# Altium PCB LEDKEY.PcbDoc
Units mm, origin at the board's own origin, x right, y up, seen from the top; angles counter-clockwise.
Board outline 53.47 x 33.05 mm, 2 copper layers (Top Layer, Bottom Layer); 32 components, 25 nets, 85 pads, 2 vias.
Unrouted connection lines stored in the file: 2.
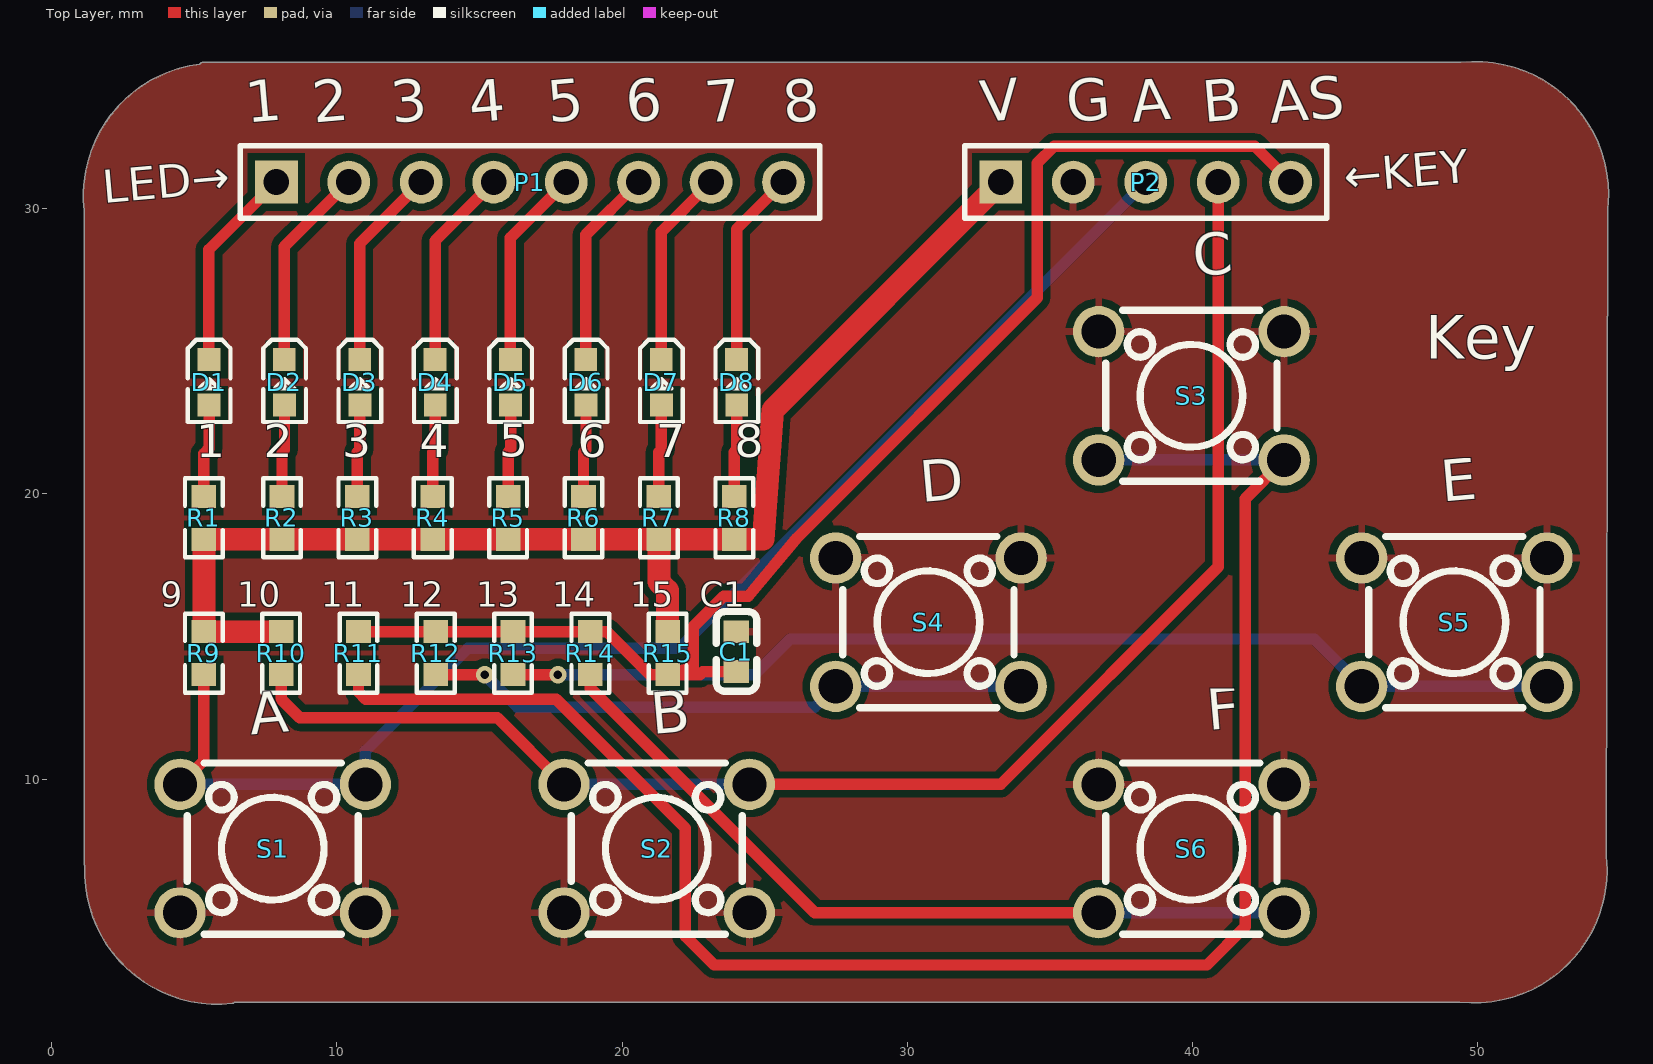
[diagram p0: Top Layer view]
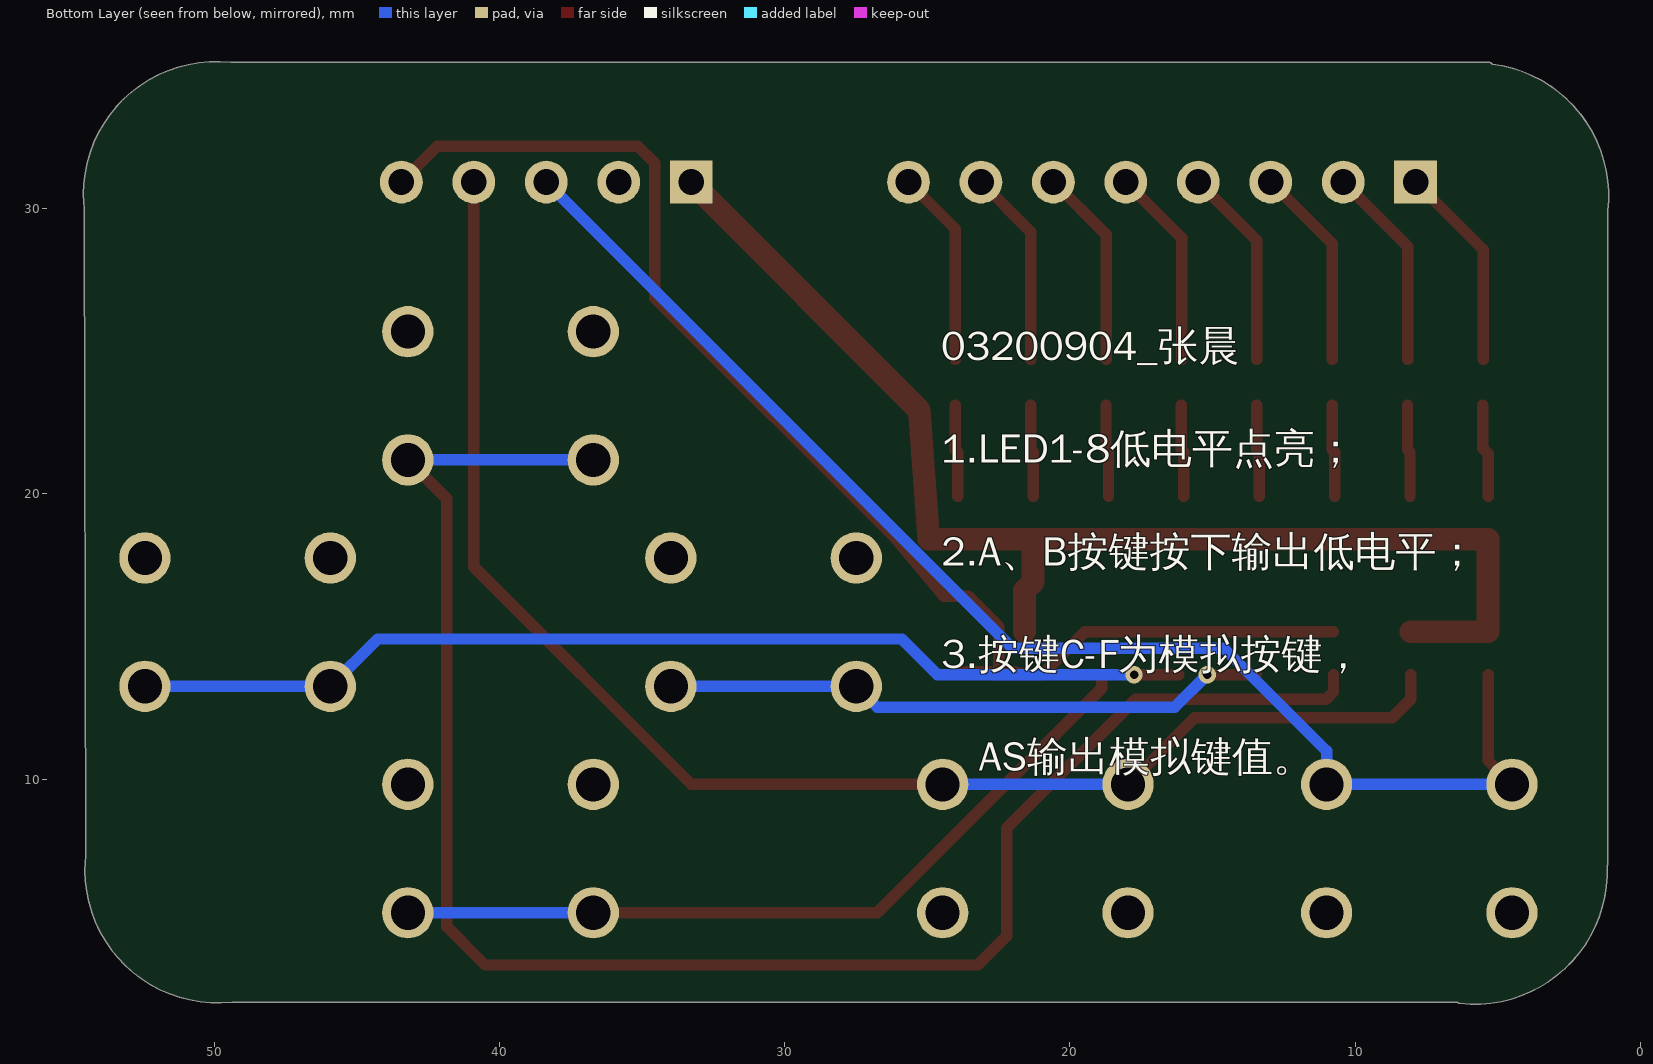
[diagram p1: Bottom Layer view, seen from below]

## Layer stack, top to bottom
Top Solder: solder mask 0.0102, Solder Resist, Dk 3.5
Top Layer: signal copper 0.0356
Dielectric1: dielectric 0.32, FR-4, Dk 4.8
Bottom Layer: signal copper 0.0356
Bottom Solder: solder mask 0.0102, Solder Resist, Dk 3.5

## Board outline
1.143,7.036 1.143,29.942 cw(c5.77,30.449) 1.143,30.962 cw(c10.514,29.923) 1.144,30.965 cw(c5.77,30.449) 5.201,35.069 cw(c5.309,35.001) 5.309,35.129 49.428,35.129 cw(c49.935,30.501) 54.59,30.501 cw(c49.935,30.501) 54.562,29.992 54.511,7.318 cw(c49.884,6.811) 54.539,6.811 cw(c49.884,6.811) 49.377,2.184 6.423,2.184 cw(c6.321,2.261) 6.335,2.134 cw(c5.821,6.761) 1.17,6.957 cw(c1.27,7.036)

## Design rules (kind name [scope] priority, off if disabled: settings)
Clearance [All] p1: gap=0.254 ignorepadtopadclearanceinfootprint=FALSE except(0: Arc-Hole Track-Hole SMDPad-Hole THPad-Hole Via-Hole Fill-Hole Poly-Hole Region-Hole Text-Hole)
PolygonConnect [All] p1: connectstyle=Relief reliefconductorwidth=0.254 reliefentries=4 polygonreliefangle="90 Angle" airgapwidth=0.254
RoutingVias [All] p1: holewidth=0.3 width=0.6 viastyle="Through Hole" minholewidth=0.3 minwidth=0.6 maxholewidth=0.3 maxwidth=0.6
SolderMaskExpansion [All] p1: expansion=0.102 istentingtop=FALSE
Width signal [InNetClass('signal')] p1: maxlimit=1 minlimit=0.254 preferedwidth=0.4
Width gnd [InNetClass('GND')] p2: maxlimit=0.254 minlimit=0.254 preferedwidth=0.254
Width vcc [InNetClass('VCC')] p3: maxlimit=1.5 minlimit=0.254 preferedwidth=0.8
Width [All] p4: maxlimit=0.254 minlimit=0.254 preferedwidth=0.254
30 further rules are at their usual default settings.

## Classes and differential pairs
net class signal: KEY1 KEY2 KEYS LED1 LED2 LED3 LED4 LED5 LED6 LED7 LED8 NetD1_2 NetD2_2 NetD3_2 NetD4_2 NetD5_2 NetD6_2 NetD7_2 NetD8_2 NetR11_1 NetR12_1 NetR13_1 NetR14_1
net class GND: GND
net class VCC: VCC

## Components (designator, comment, footprint, x,y, rotation, side; value= is the part's Value field where it differs from the comment)
C1 "Cap" C0603 24.01,14.47 r270 top value=100pF
D1 "LED0" LED0603 5.52,23.912 r270 top
D2 "LED0" LED0603 8.163,23.912 r270 top
D3 "LED0" LED0603 10.805,23.912 r270 top
D4 "LED0" LED0603 13.448,23.912 r270 top
D5 "LED0" LED0603 16.091,23.912 r270 top
D6 "LED0" LED0603 18.734,23.912 r270 top
D7 "LED0" LED0603 21.376,23.912 r270 top
D8 "LED0" LED0603 24.019,23.912 r270 top
P1 "Header 8" HDR1X8 7.881,30.933 r0 top
P2 "Header 5" HDR1X5 33.281,30.933 r0 top
R1 "Res1" R0603 5.341,19.161 r270 top value=1K
R2 "Res1" R0603 8.079,19.161 r270 top value=1K
R3 "Res1" R0603 10.721,19.161 r270 top value=1K
R4 "Res1" R0603 13.364,19.161 r270 top value=1K
R5 "Res1" R0603 16.007,19.161 r270 top value=1K
R6 "Res1" R0603 18.65,19.161 r270 top value=1K
R7 "Res1" R0603 21.292,19.161 r270 top value=1K
R8 "Res1" R0603 23.935,19.161 r270 top value=1K
R9 "Res1" R0603 5.341,14.414 r90 top value=1K
R10 "Res1" R0603 8.05,14.414 r90 top value=1K
R11 "Res1" R0603 10.76,14.414 r90 top value=1K
R12 "Res1" R0603 13.469,14.414 r90 top value=1K
R13 "Res1" R0603 16.178,14.414 r90 top value=1K
R14 "Res1" R0603 18.888,14.414 r90 top value=1K
R15 "Res1" R0603 21.597,14.414 r90 top value=1K
S1 "SW-PB" SW-PB 7.754,7.565 r0 top
S2 "SW-PB" SW-PB 21.216,7.565 r0 top
S3 "SW-PB" SW-PB 39.961,23.44 r0 top
S4 "SW-PB" SW-PB 30.741,15.503 r0 top
S5 "SW-PB" SW-PB 49.181,15.503 r0 top
S6 "SW-PB" SW-PB 39.961,7.565 r0 top

## Footprints (in the part's own frame and the unit in brackets; to place one, negate y for a bottom-side part, rotate by r counter-clockwise, add the part's x,y. Pads: shape width x height; smd on the part's side, far side on the other; paste and mask are expansions set on the pad)
C0603 [mm]
  rect 0.8x0.9 smd: 1(-0.7,0) 2(0.7,0)
  silkscreen extent -1.41,-0.71 1.39,0.72
HDR1X5 [mm] "Connector; Header; 5 Position"
  rect 1.5x1.5 hole 0.9: 1(0,0)
  round 1.5 hole 0.9: 2(2.54,0) 3(5.08,0) 4(7.62,0) 5(10.16,0)
  silkscreen extent -1.27,-1.27 11.43,1.27
HDR1X8 [mm] "Connector; Header; 8 Position"
  rect 1.5x1.5 hole 0.9: 1(0,0)
  round 1.5 hole 0.9: 2(2.54,0) 3(5.08,0) 4(7.62,0) 5(10.16,0) 6(12.7,0) 7(15.24,0) 8(17.78,0)
  silkscreen extent -1.27,-1.27 19.05,1.27
LED0603 [mm]
  rect 0.8x0.8 smd: 1(-0.799,-0.003) 2(0.799,0.004)
  silkscreen extent -1.49,-0.75 1.39,0.76
R0603 [mm]
  rect 0.806x0.864 smd: 1(-0.753,0) 2(0.753,0)
  silkscreen extent -1.39,-0.66 1.39,0.66
SW-PB [mm] "SW-TH_4P-L6.0-W6.0-P4.50-LS6.5"
  round 1.8 hole 1.2: 1(-3.25,2.25) 1(3.25,2.25) 2(-3.25,-2.25) 2(3.25,-2.25)
  silkscreen extent -3,-3 3,3

## Part data
C1: "Capacitor", LatestRevisionDate=17-Jul-2002, LatestRevisionNote="Re-released for DXP Platform.", PackageDescription="Radial Cap, Thru-Hole; 2 Leads; 0.3 in Pin Spacing", PackageReference=RAD-0.3, Published=8-Jun-2000, Publisher="Altium Limited"
D1 D2 D3 D4 D5 D6 D7 D8: library part LED, "Typical INFRARED GaAs LED", LatestRevisionDate=08-Jul-2005, LatestRevisionNote="Mech Layer 1 removed.", PackageDescription="LED; 2 Leads", PackageReference=LED-0, Published=8-Jun-2000, Publisher="Altium Limited"
P1: "Header, 8-Pin", LatestRevisionDate=17-Jul-2002, LatestRevisionNote="Re-released for DXP Platform.", Publisher="Altium Limited"
P2: "Header, 5-Pin", LatestRevisionDate=17-Jul-2002, LatestRevisionNote="Re-released for DXP Platform.", Publisher="Altium Limited"
R1 R2 R3 R4 R5 R6 R7 R8 R9 R10 R11 R12 R13 R14 R15: library part Res, "Resistor", LatestRevisionDate=17-Jul-2002, LatestRevisionNote="Re-released for DXP Platform.", PackageDescription="Axial Device, Thru-Hole; 2 Leads; 0.3 in Pin Spacing", PackageReference=AXIAL-0.3, Published=8-Jun-2000, Publisher="Altium Limited"
S1 S2 S3 S4 S5 S6: "Switch", LatestRevisionDate=17-Jul-2002, LatestRevisionNote="Re-released for DXP Platform.", PackageDescription="Switch; 2 Leads", PackageReference=SPST-2, Published=24-Mar-1999, Publisher="Altium Limited"

## Via types
v1: diameter 0.6, hole 0.3, Top Layer to Bottom Layer, 2 vias

## Nets (pads, with @x,y where several pads share a name; then routed paths per layer and width w, separated by ;. In a path a pad name is that pad's centre, name@x,y a point inside that pad or via, vN(x,y) a via of type N, cw(c..) or ccw(c..) an arc to the next point about the centre after c; other vN are vias at no path point)
GND: C1.1 P2.2 S1.2 S2.2 S3.1 S4.1 S5.1 S6.1
KEY1: P2.3 R9.1 S1.1 | length 47.5
  Top Layer w0.4: S1.1@4.504,9.815 5.341,10.652 R9.1
  Bottom Layer w0.4: S1.1@4.504,9.815 11.004,9.815 11.004,10.99 14.596,14.582 22.01,14.582 P2.3
KEY2: P2.4 R10.1 S2.1 | length 51.6
  Top Layer w0.4: R10.1 8.05,12.804 8.705,12.15 15.631,12.15 S2.1@17.966,9.815 ; S2.1@24.466,9.815 33.273,9.815 40.901,17.443 P2.4
  Bottom Layer w0.4: S2.1@17.966,9.815 S2.1@24.466,9.815
KEYS: C1.2 P2.5 R11.2 R12.2 R13.2 R14.2 R15.1 | length 47.6
  Top Layer w0.4: R11.2 R12.2 R13.2 R14.2 19.473,15.168 20.979,13.661 R15.1 ; C1.2 22.833,13.77 22.724,13.661 R15.1 ; P2.5 42.19,32.184 35.145,32.184 34.56,31.6 34.56,26.879 26.153,18.472 24.426,16.411 23.562,16.411 22.495,15.344 22.495,13.94 R15.1
LED1: D1.1 P1.1 | length 7.2
  Top Layer w0.4: D1.1 5.517,28.569 P1.1
LED2: D2.1 P1.2 | length 7.2
  Top Layer w0.4: D2.1 8.159,28.671 P1.2
LED3: D3.1 P1.3 | length 7.1
  Top Layer w0.4: D3.1 10.802,28.774 P1.3
LED4: D4.1 P1.4 | length 7.1
  Top Layer w0.4: D4.1 13.445,28.877 P1.4
LED5: D5.1 P1.5 | length 7
  Top Layer w0.4: D5.1 16.087,28.979 P1.5
LED6: D6.1 P1.6 | length 7
  Top Layer w0.4: D6.1 18.73,29.082 P1.6
LED7: D7.1 P1.7 | length 6.9
  Top Layer w0.4: D7.1 21.373,29.185 P1.7
LED8: D8.1 P1.8 | length 6.9
  Top Layer w0.4: D8.1 24.016,29.288 P1.8
NetD1_2: D1.2 R1.1 | length 3.3
  Top Layer w0.4: R1.1 5.341,21.415 5.524,21.597 D1.2
NetD2_2: D2.2 R2.1 | length 3.2
  Top Layer w0.4: R2.1 8.079,21.465 8.166,21.553 D2.2
NetD3_2: D3.2 R3.1 | length 3.2
  Top Layer w0.4: R3.1 10.721,21.465 10.809,21.553 D3.2
NetD4_2: D4.2 R4.1 | length 3.2
  Top Layer w0.4: R4.1 13.364,21.465 13.452,21.553 D4.2
NetD5_2: D5.2 R5.1 | length 3.2
  Top Layer w0.4: R5.1 16.007,21.465 16.094,21.553 D5.2
NetD6_2: D6.2 R6.1 | length 3.2
  Top Layer w0.4: R6.1 18.65,21.465 18.737,21.553 D6.2
NetD7_2: D7.2 R7.1 | length 3.2
  Top Layer w0.4: R7.1 21.292,21.465 21.38,21.553 D7.2
NetD8_2: D8.2 R8.1 | length 3.2
  Top Layer w0.4: R8.1 23.935,21.465 24.023,21.553 D8.2
NetR11_1: R11.1 S3.2 | length 61.9
  Top Layer w0.4: R11.1 10.76,13.058 11.014,12.804 17.695,12.804 22.216,8.283 22.216,4.498 23.232,3.482 40.504,3.482 41.85,4.828 41.85,19.829 S3.2@43.211,21.19
  Bottom Layer w0.4: S3.2@36.711,21.19 S3.2@43.211,21.19
NetR12_1: R12.1 S4.2 | length 21.3
  Top Layer w0.4: R12.1 v1(15.187,13.661)
  Bottom Layer w0.4: v1(15.187,13.661) 16.323,12.525 26.763,12.525 27.491,13.253 S4.2@33.991,13.253
NetR13_1: R13.1 S5.2 | length 37.5
  Top Layer w0.4: R13.1 v1(17.752,13.661)
  Bottom Layer w0.4: v1(17.752,13.661) 24.648,13.661 25.899,14.912 44.272,14.912 45.931,13.253 S5.2@52.431,13.253
NetR14_1: R14.1 S6.2 | length 28.1
  Top Layer w0.4: R14.1 18.888,13.185 26.758,5.315 S6.2@36.711,5.315
  Bottom Layer w0.4: S6.2@36.711,5.315 S6.2@43.211,5.315
VCC: P2.1 R1.2 R2.2 R3.2 R4.2 R5.2 R6.2 R7.2 R8.2 R9.2 R10.2 R15.2 | length 44.8
  Top Layer w0.8: R10.2 R9.2 R1.2 R2.2 R3.2 R4.2 R5.2 R6.2 R7.2 ; R15.2 21.597,16.614 21.292,16.919 R7.2 ; P2.1 25.283,22.935 24.95,18.408 R8.2 R7.2

## Polygon pours and split planes (outlines as drawn)
GND on Top Layer "GND_L01_P000" (solid, pour order 0): 1.143,7.036 1.143,29.942 cw(c5.77,30.449) 1.143,30.962 cw(c10.514,29.923) 1.144,30.965 cw(c5.77,30.449) 5.201,35.069 cw(c5.309,35.001) 5.309,35.129 49.428,35.129 cw(c49.935,30.501) 54.59,30.501 cw(c49.935,30.501) 54.562,29.992 54.511,7.318 cw(c49.884,6.811) 54.539,6.811 cw(c49.884,6.811) 49.377,2.184 6.423,2.184 cw(c6.321,2.261) 6.335,2.134 cw(c5.821,6.761) 1.17,6.957 cw(c1.27,7.036)

## Silkscreen, mask and mechanical layers (free items; w line width, h text height)
Top Overlay:
  text "1" at 6.887,32.528 h2.5 r5
  text "3" at 11.995,32.527 h2.5 r5
  text "4" at 14.724,32.528 h2.5 r5
  text "5" at 17.491,32.535 h2.5 r5
  text "6" at 20.242,32.535 h2.5 r5
  text "7" at 22.998,32.528 h2.5 r5
  text "V" at 32.658,32.539 h2.5 r5
  text "G" at 35.686,32.543 h2.5 r5
  text "A" at 37.954,32.534 h2.5 r5
  text "B" at 40.45,32.544 h2.5 r5
  text "2" at 9.238,32.52 h2.5 r5
  text "8" at 25.743,32.527 h2.5 r5
  text "AS" at 42.8,32.506 h2.5 r5
  text "←KEY" at 45.382,30.18 h2 r5
  text "LED→" at 1.859,29.8 h2 r5
  text "C" at 40.12,27.134 h2.5 r5
  text "Key" at 48.159,24.74 h1.52
  text "1" at 5.072,20.897 h2
  text "2" at 7.435,20.897 h2
  text "3" at 10.19,20.905 h2
  text "4" at 12.916,20.897 h2
  text "5" at 15.689,20.913 h2
  text "6" at 18.443,20.905 h2
  text "7" at 21.2,20.905 h2
  text "8" at 23.947,20.905 h2
  text "D" at 30.551,19.22 h2.5 r5
  text "E" at 48.817,19.239 h2.5 r5
  text "9" at 3.836,15.739 h1.5
  text "10" at 6.503,15.739 h1.5
  text "11" at 9.449,15.739 h1.5
  text "12" at 12.218,15.739 h1.5
  text "13" at 14.885,15.739 h1.5
  text "14" at 17.552,15.739 h1.5
  text "15" at 20.295,15.739 h1.5
  text "C1" at 22.733,15.739 h1.5
  text "F" at 40.601,11.224 h2.5 r5
  text "A" at 7.03,11.071 h2.5 r5
  text "B" at 21.114,11.081 h2.5 r5
Bottom Overlay:
  text "03200904_张晨 /  / 1.LED1-8低电平点亮； /  / 2.A、B按键按下输出低电平； /  / 3.按键C-F为模拟按键， /  /    AS输出模拟键值。" at 24.511,9.939 h1.8
Mechanical 1:
  lines w0.254: 1.27,7.036 1.27,30.949 ; 1.27,29.949 cw(c5.77,30.449) 6.27,34.949 ; 1.321,7.261 ccw(c5.821,6.761) 6.321,2.261 ; 5.309,35.001 49.435,35.001 cw(c49.935,30.501) 54.435,30.001 ; 5.436,2.311 49.606,2.311 ; 49.384,2.311 ccw(c49.884,6.811) 54.384,7.311 54.435,30.102